# Altium PCB Final PCB.PcbDoc
Units mm, origin at the board's own origin, x right, y up, seen from the top; angles counter-clockwise.
Board outline 152.4 x 101.6 mm, 2 copper layers (Top Layer, Bottom Layer); 40 components, 30 nets, 161 pads, 16 vias.
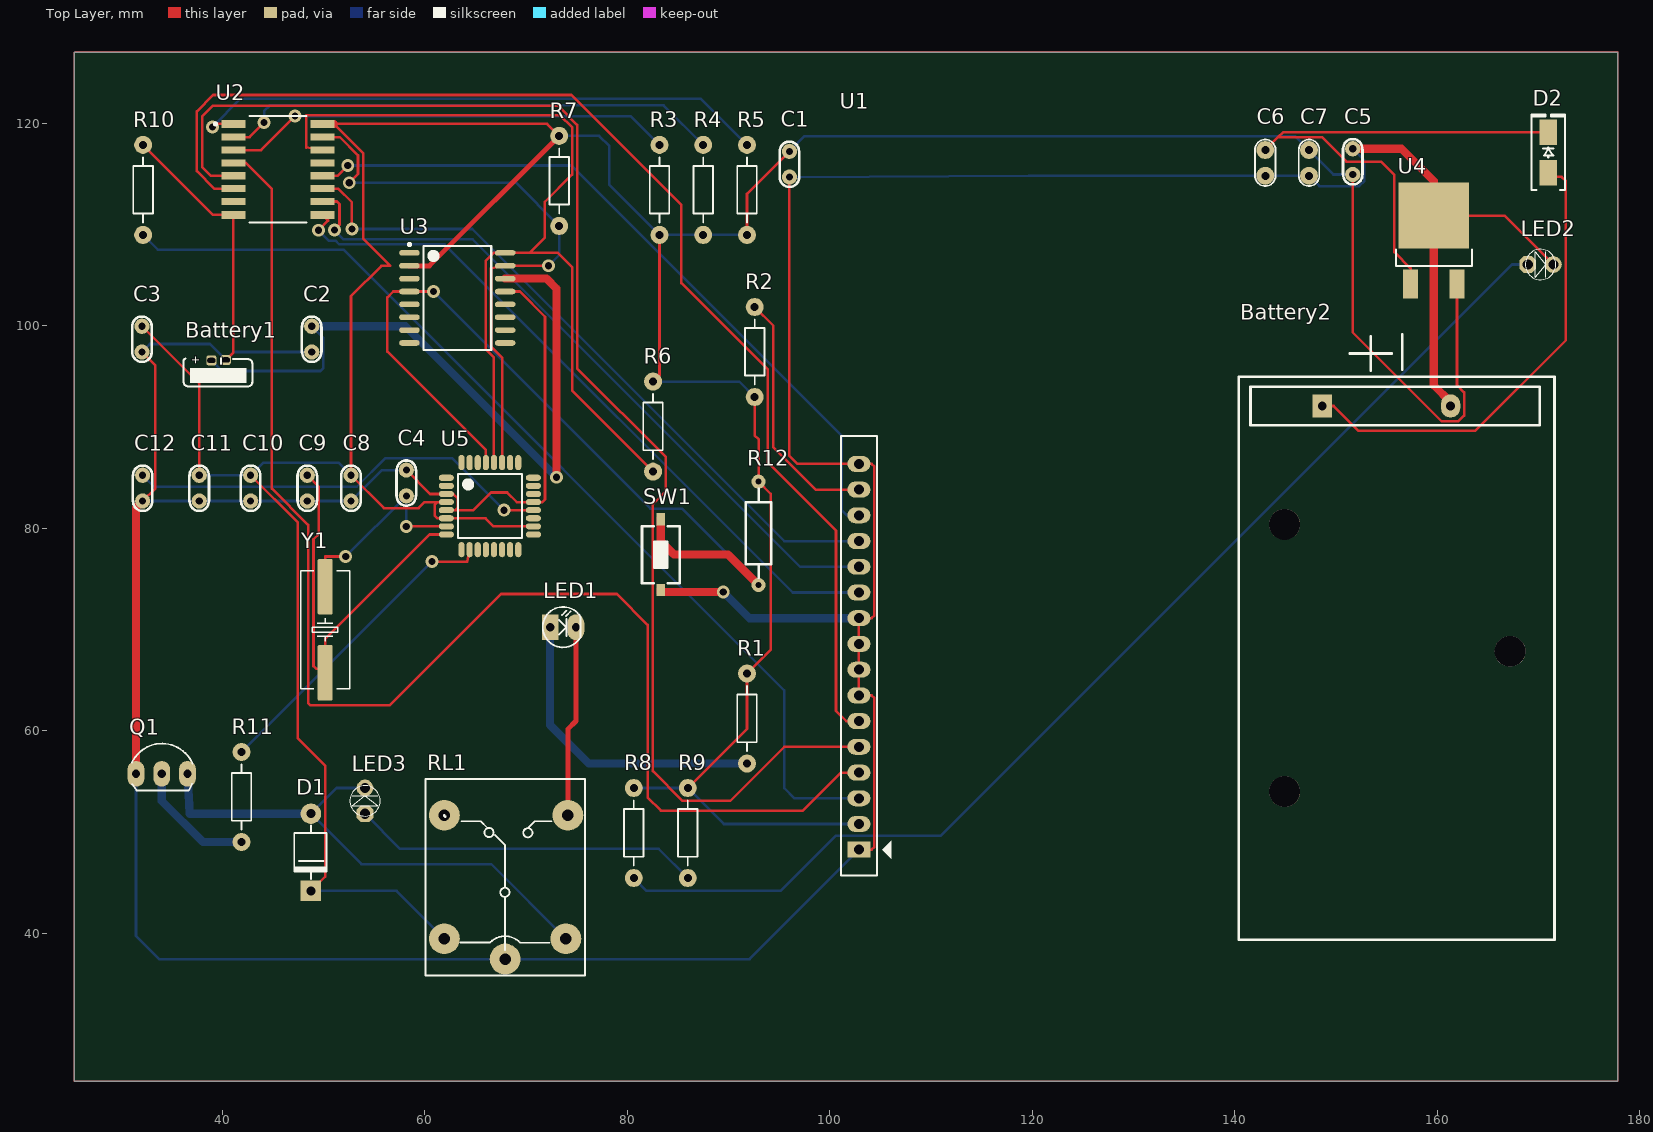
[diagram p0: Top Layer view]
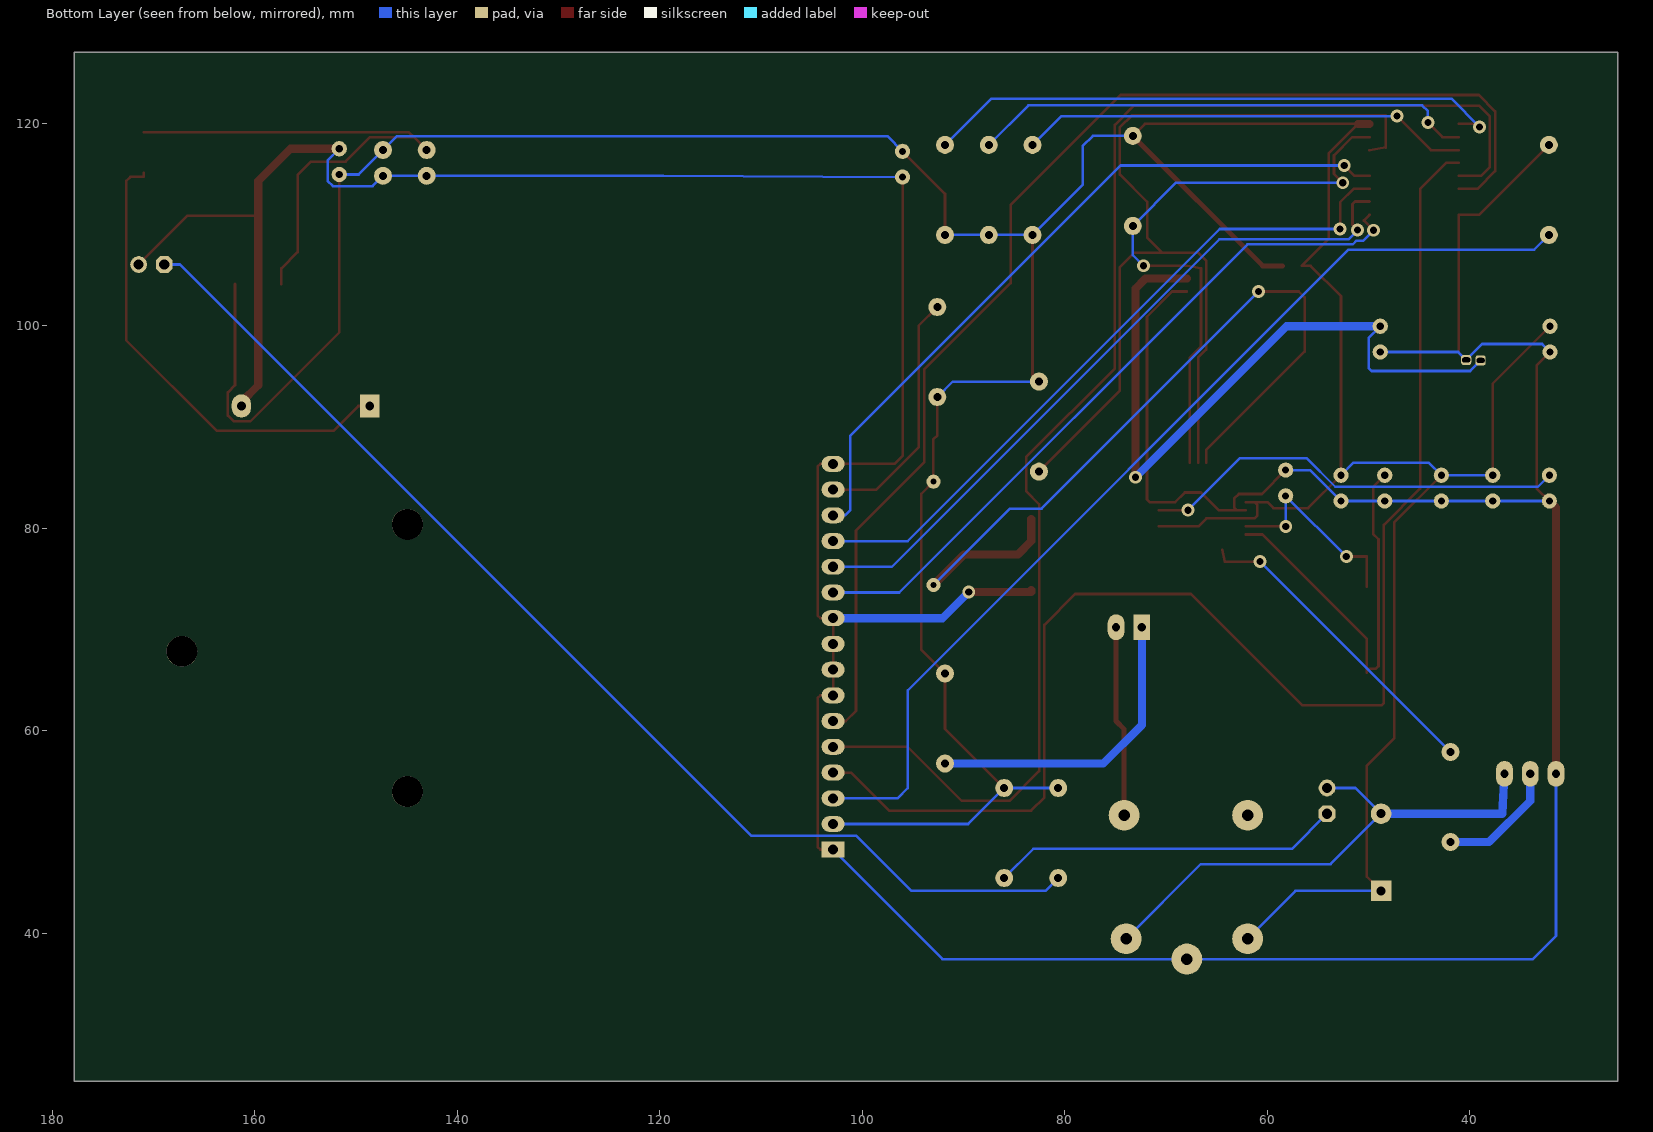
[diagram p1: Bottom Layer view, seen from below]
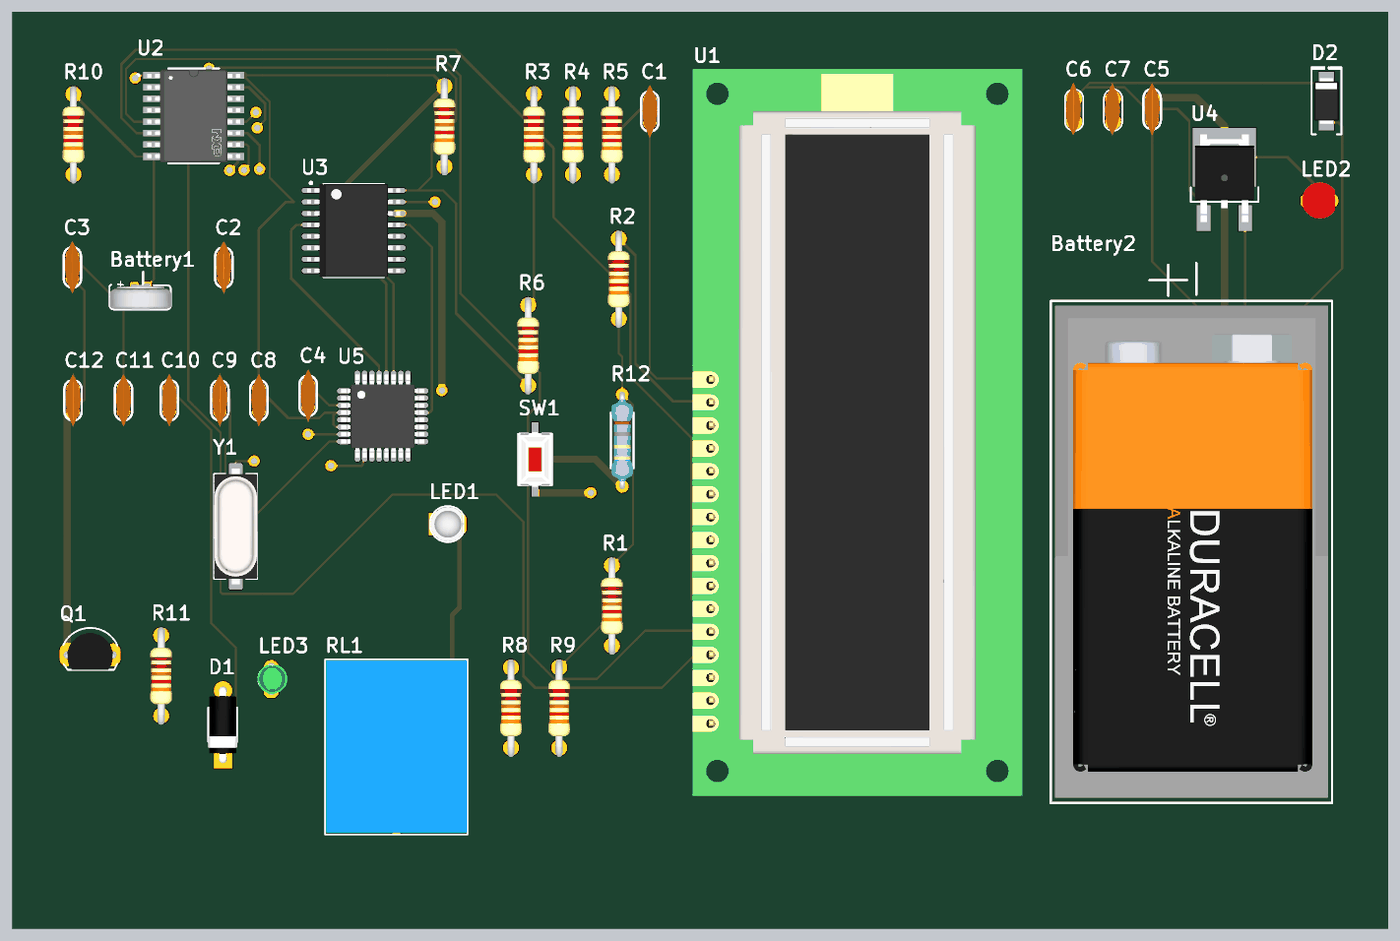
[diagram p2: 3D render of the assembled board from above, using the file's embedded part models]

## Layer stack, top to bottom
Top Solder: solder mask 0.0102, Solder Resist, Dk 3.5
Top Layer: signal copper 0.0356
Dielectric 1: dielectric 0.32, FR-4, Dk 4.8
Bottom Layer: signal copper 0.0356
Bottom Solder: solder mask 0.0102, Solder Resist, Dk 3.5

## Board outline
25.4,25.4 177.8,25.4 177.8,127 25.4,127

## Design rules (kind name [scope] priority, off if disabled: settings)
Clearance [All] p1: gap=0.254 ignorepadtopadclearanceinfootprint=FALSE
PolygonConnect [All] p1: connectstyle=Relief reliefconductorwidth=0.254 reliefentries=4 polygonreliefangle="90 Angle" airgapwidth=0.254
RoutingVias [All] p1: holewidth=0.711 width=1.27 viastyle="Through Hole" minholewidth=0.711 minwidth=1.27 maxholewidth=0.711 maxwidth=1.27
SolderMaskExpansion [All] p1: expansion=0.102 istentingtop=FALSE
SupplyNets "Schematic Supply Nets_1" [InNet('+5')] p1: voltage=0.000
SupplyNets "Schematic Supply Nets" [InNet('GND')] p2: voltage=0.000
Width [All] p1: maxlimit=1.5 minlimit=0.5 preferedwidth=1
30 further rules are at their usual default settings.

## Components (designator, comment, footprint, x,y, rotation, side; value= is the part's Value field where it differs from the comment)
Battery1 "3V" "PIN 3.6V 20mAh 3/V20H" 39.624,95.758 r90 top value="PIN 3V"
Battery2 "9V" "De Pin 9V" 171.641,39.233 r90 top
C1 "104" "tu gom" 96.012,115.951 r90 top
C2 "104" "tu gom" 48.844,98.679 r90 top
C3 "104" "tu gom" 32.08,98.679 r90 top
C4 "22pF" "tu gom" 58.184,84.474 r90 top
C5 "104" "tu gom" 151.638,116.205 r90 top
C6 "0.33uF" CN1 143.002,114.808 r90 top
C7 "22uF" CN1 147.32,114.808 r90 top
C8 "104" "tu gom" 52.723,83.966 r90 top
C9 "22pF" "tu gom" 48.405,83.966 r90 top
C10 "104" "tu gom" 42.817,83.966 r90 top
C11 "104" "tu gom" 37.737,83.966 r90 top
C12 "104" "tu gom" 32.149,83.966 r90 top
D1 "100v" "DIODE 1A" 48.768,53.086 r90 top
D2 "SS34" "DIODE SMA" 170.942,117.094 r90 top
LED1 "LED 3mm" LED-3MM-WHITE 72.39,70.231 r0 top
LED2 "Power LED" LED-3MM-RED 168.91,106.045 r0 top
LED3 "Relay Status LED" LED-3MM-GREEN 54.102,51.816 r90 top
Q1 "?" TO92 34.036,55.753 r0 top value=C9014
R1 "1k" R1/4W 91.821,56.769 r90 top
R2 "220" R1/4W 92.583,92.964 r90 top
R3 "10k" R1/4W 83.185,108.966 r90 top
R4 "10k" R1/4W 87.503,108.966 r90 top
R5 "10k" R1/4W 91.821,108.966 r90 top
R6 "10k" R1/4W 82.55,85.598 r90 top
R7 "10k" R1/4W 73.279,109.855 r90 top
R8 "1k" R1/4W 80.645,45.466 r90 top
R9 "1k" R1/4W 85.979,45.466 r90 top
R10 "1k" R1/4W 32.194,108.966 r90 top
R11 "1k" R1/4W 41.91,49.022 r90 top
R12 "10k" "tro vach 1/4w" 92.964,79.502 r90 top
RL1 "Relay" "Relay 5 Chan SRD" 67.945,37.465 r90 top
SW1 "Nut Nhan" "Nut Nhan 2 Chan SMD 3x6x2.5" 83.312,77.399 r90 top
U1 "LCD1602" "LCD1602 with Jump" 102.87,48.26 r90 top
U2 "PCF8574" FP-SOT162-1-MFG 45.511,115.443 r0 top
U3 "DS3231" "SOIC 16" 63.22,102.743 r0 top
U4 "L7805" DPAK_118_446_112X59_SMD 159.512,108.144 r90 top
U5 "ATMEGA328P" TQFP-32 66.439,82.188 r0 top
Y1 "16Mhz" "Thach Anh 2 chan SMD" 50.165,69.977 r90 top value=4Mhz

## Footprints (in the part's own frame and the unit in brackets; to place one, negate y for a bottom-side part, rotate by r counter-clockwise, add the part's x,y. Pads: shape width x height; smd on the part's side, far side on the other; paste and mask are expansions set on the pad)
CN1 [mil]
  round 70 hole 31: 1(0,0) 2(100,0)
  silkscreen extent -40,-40 141,40, body extent -60,-30 170,37, height 265
"De Pin 9V" [mil]
  round 120 hole 120: 0(581.4,1052.4) 0(1126.9,175.9) 0(1620.4,1052.5)
  rect 90x75 hole 34: 1(2080.5,905.75)
  oval 90x75 hole 34: 2(2080.5,407.05)
  silkscreen extent 5,3 2360,1230, body extent 27,20 2173,1210, height 894
"DIODE 1A" [mil] "Diode 1A"
  round 80 hole 35: 1(-50,0)
  rect 80x80 hole 35: 2(-350,0)
  silkscreen extent -305,-61 -95,65, body extent -366,-61 -34,65, height 122
"DIODE SMA" [mm] "SMA"
  rect 2.5x1.7 smd: 1(-2,0) 2(2,0)
  silkscreen extent -3.68,-1.65 3.75,1.65, body extent -2.6,-1.37 2.6,1.37, height 2.4
DPAK_118_446_112X59_SMD [mm] "CASE: DPAK"
  rect 2.85x1.5 smd: 1(-4.023,2.163) 3(-4.023,-2.417)
  rect 6.5x7 smd: 2(2.727,-0.127)
  silkscreen extent -2.22,-3.9 -0.62,3.6, body extent -4.47,-3.43 5.23,3.15, height 2.3
FP-SOT162-1-MFG [mm]
  rect 2.4x0.8 smd paste+0 mask+0: 1(-4.4,4.495) 8(-4.4,-4.495) 9(4.4,-4.495) 16(4.4,4.495)
  rect 2.4x0.7 smd paste+0 mask+0: 2(-4.4,3.175) 3(-4.4,1.905) 4(-4.4,0.635) 5(-4.4,-0.635) 6(-4.4,-1.905) 7(-4.4,-3.175) 10(4.4,-3.175) 11(4.4,-1.905) 12(4.4,-0.635) 13(4.4,0.635) 14(4.4,1.905) 15(4.4,3.175)
  silkscreen extent -6.29,-5.25 2.82,5.25, body extent -5.72,-5.95 5.72,5.95, height 0.25
"LCD1602 with Jump" [mil] "LCD dipslay 16x2, 16 pin"
  rect 62x90 hole 39: 1(0,0)
  oval 62x90 hole 39: 2(100,0) 3(200,0) 4(300,0) 5(400,0) 6(500,0) 7(600,0) 8(700,0) 9(800,0) 10(900,0) 11(1000,0) 12(1100,0) 13(1200,0) 14(1300,0) 15(1400,0) 16(1500,0)
  silkscreen extent -100,-125 1608,70, body extent -320,-1353 2850,84, height 764
LED-3MM-GREEN [mil]
  oct 65x65 hole 40: 1(0,0)
  round 65 hole 40: 2(100,0)
  silkscreen extent -9,-59 109,59, body extent -15,-70 112,60, height 182
LED-3MM-RED [mil]
  oct 65x65 hole 40: 1(0,0)
  round 65 hole 40: 2(100,0)
  silkscreen extent -9,-59 109,59, body extent -27,-77 117,80, height 181
LED-3MM-WHITE [mil] "LED 2 PIN, 3ly Only colour"
  rect 65x100 hole 32: 1(0,0)
  oval 65x100 hole 32: 2(100,0)
  silkscreen extent -29,-78 118,79, body extent -25,-75 113,75, height 217
"Nut Nhan 2 Chan SMD 3x6x2.5" [mm] "Switch SMD type"
  rect 1.2x0.8 smd: 1(-3.5,0) 2(3.5,0)
  silkscreen extent -2.82,-1.85 2.82,1.85, body extent -3.05,-1.85 3.05,1.85, height 2.5
"PIN 3.6V 20mAh 3/V20H" [mm] "batttery"
  rrect50% 1x1 hole 0.5 slot 0.8 at 90 deg unplated: 1(0.813,0.686) 2(0.864,-0.737)
  silkscreen extent -1.75,-3.35 0.99,3.43, body extent -1.74,-3.4 0.96,3.4, height 8.4
R1/4W [mil] "R 1/4W, 2 Pin, 350mil"
  round 70 hole 31: 1(0,0) 2(350,0)
  silkscreen extent 48,-38 302,38, body extent -40,-47 386,47, height 111
"Relay 5 Chan SRD" [mil] "Relay SPDT, 5 pin, 10A,W 650mil, L 800mil, H 800mil"
  round 120 hole 45: 1(0,0) 2(559.06,236.22) 3(559.06,-243.78) 4(78.74,-236.22) 5(78.74,236.22)
  silkscreen extent -63,-311 700,310, body extent -55,-306 697,304, height 602
"SOIC 16" [mm] "SOIC, 16-Leads, Body 10.30x7.50mm, Pitch 1.27mm, IPC Medium Density"
  oval 2.032x0.55 smd: 1(-4.725,4.445) 2(-4.725,3.175) 3(-4.725,1.905) 4(-4.725,0.635) 5(-4.725,-0.635) 6(-4.725,-1.905) 7(-4.725,-3.175) 8(-4.725,-4.445) 9(4.725,-4.445) 10(4.725,-3.175) 11(4.725,-1.905) 12(4.725,-0.635) 13(4.725,0.635) 14(4.725,1.905) 15(4.725,3.175) 16(4.725,4.445)
  silkscreen extent -4.85,-5.15 3.35,5.39, body extent -5.15,-5.17 5.16,5.16, height 2.48
"Thach Anh 2 chan SMD" [mm] "SMD Crystal HC49/US-SM package"
  round 0.508 on Mech15: 0(0,0)
  rrect25% 5.5x1.5 smd: 1(-4.25,0) 2(4.25,0)
  silkscreen extent -5.84,-2.41 5.84,2.41, body extent -6.4,-2.41 6.4,2.42, height 4.29
TO92 [mil] "TO-92"
  oval 66x100 hole 32: 1(-100,0) 2(0,0) 3(100,0)
  silkscreen extent -117,-65 120,118, body extent -109,-66 109,95, height 245
TQFP-32 [mm] "TQFP, 32-Leads, Body 7.10x7.10mm, Pitch 0.80mm, IPC Medium Density"
  oval 1.5x0.6 smd mask+0.076: 1(-4.3,2.8) 2(-4.3,2) 3(-4.3,1.2) 4(-4.3,0.4) 5(-4.3,-0.4) 6(-4.3,-1.2) 7(-4.3,-2) 8(-4.3,-2.8) 17(4.3,-2.8) 18(4.3,-2) 19(4.3,-1.2) 20(4.3,-0.4) 21(4.3,0.4) 22(4.3,1.2) 23(4.3,2) 24(4.3,2.8)
  oval 0.6x1.5 smd mask+0.076: 9(-2.8,-4.3) 10(-2,-4.3) 11(-1.2,-4.3) 12(-0.4,-4.3) 13(0.4,-4.3) 14(1.2,-4.3) 15(2,-4.3) 16(2.8,-4.3) 25(2.8,4.3) 26(2,4.3) 27(1.2,4.3) 28(0.4,4.3) 29(-0.4,4.3) 30(-1.2,4.3) 31(-2,4.3) 32(-2.8,4.3)
  silkscreen extent -3.15,-3.15 3.15,3.15, body extent -4.62,-4.62 4.63,4.63, height 1.2
"tro vach 1/4w" [mm]
  round 1.4 hole 0.6: 1(-5.1,0) 2(5.1,0)
  silkscreen extent -4.39,-1.25 4.42,1.25, body extent -5.38,-1.2 5.38,1.2, height 2.41
"tu gom" [mm] "Tu gom mini"
  round 1.5 hole 0.7: 1(-1.27,0) 2(1.27,0)
  silkscreen extent -2.25,-0.97 2.22,0.97, body extent -2.92,-0.85 2.92,0.85, height 6.12

## Part data
Battery1: library part "PIN 3V", "Battery 3VDC , NI-MH 3.6V 20mAh 3/V20H"
Battery2: library part "De pin 9V cam", "De Pin 9V", Ma_Hang=MH002680, Ten="Hộp Đế Pin 9V Thường"
C1 C2 C3 C5 C8 C10 C11 C12: library part "Tu gom 104 50V", "Cắm", Chung_Loai=Cắm, Don_Vi=Con, Ma_Hang=MH004761, So_Chan=2, Ten_Linh_Kien="Tụ gốm 104 100nF 50V"
C4 C9: library part "Tu gom 22pF 50V", "Cắm", Chung_Loai=Cắm, Don_Vi=Con, Ma_Hang=MH004771, So_Chan=2, Ten_Linh_Kien="Tụ gốm 22P 50V"
C6 C7: library part "CAP gom"
D1: library part "Diode 1N4007", "Cắm", Chung_Loai=Cắm, Don_Vi=Con, Ma_Hang=MH001063, Ten_Linh_Kien="Diode 1N4007 1A (DIP)"
D2: library part "Diode SS34 ( 1N5822 )", "Dán", Chung_Loai=Dán, Don_Vi=Con, Ma_Hang=MH002104, Ten_Linh_Kien="Diode SS34 3A 40V SMA ( 1N5822 SS34A)"
LED1: library part "LED 3mm Trang", "Cắm", Chung_Loai=Cắm, Don_Vi=Con, Ma_Hang=MH009001, Ten_Linh_Kien="LED 3MM Trắng SS (1000c)"
LED2: library part "LED 3mm Do", "Cắm", Chung_Loai=Cắm, Don_Vi=Con, Ma_Hang=MH003892, Ten_Linh_Kien="Led 3MM Phủ Đỏ (10c)"
LED3: library part "LED 3mm Xanh La", "Cắm", Chung_Loai=Cắm, Don_Vi=Con, Ma_Hang=MH001054, Ten_Linh_Kien="Led 3MM Phủ Xanh (10c)"
Q1: library part "Trans 2N3904", "NPN transistor EBC"
R1 R2 R3 R4 R5 R6 R7 R8 R9 R10 R11: library part Res, "Res"
R12: library part "Tro Vach 1/4W 5% 10k", "Căm", Chung_Loai=Cắm, Don_Vi=Con, Ma_Hang=MH007354, So_Chan=2, Ten_Linh_Kien="Trở Vạch 1/4w 5% 10K"
RL1: library part "Relay 5 Chan SRD", "Relay 5 Chan", Ma_Hang=MH009374, Ten="Relay 5V10A SRD-05VDC-SL-C Chính Hãng"
SW1: library part "Nut Nhan 2 Chan SMD 3x6x2.5", "Nut Nhan 2 Chan SMD 3x6x2.5", Ma_Hang=MH001036, Ten="Nút Nhấn 2 Chân 3x6x2.5MM SMD"
U1: library part "LCD1602 XL", "LCD 1602 Xanh Lá", CHIP=HD44780, Ma_Hang=67HZ, NCC=NSHOP, Ten="Màn hình LCD 1602 Xanh Lá"
U2: library part CMP-10112-000010-1, "IC I/O EXPANDER I2C 8B 16SOIC", Ambient Temperature Range High=+85°C, Ambient Temperature Range Low=-40°C, Frequency=100kHz, Manufacturer="NXP Semiconductors", Manufacturer Part Number=PCF8574T/3,518, Max Junction Temp=+125°C, Max Supply Voltage=6V, Min Supply Voltage=2.5V, Nominal Supply Current=40uA, Package=SOT162-1, Temperature="-40°C to +85°C", Automotive=No, Category=IC, ComponentLink2Description=Datasheet, ComponentLink2URL=https://www.nxp.com/docs/en/data-sheet/PCF8574_PCF8574A.pdf, Device Class L1="Integrated Circuits (ICs)", Device Class L2="Interface ICs", Device Class L3="I/O Expanders", Digikey Description="IC I/O EXPANDER I2C 8B 16SOIC", Footprint Url=https://www.nxp.com/docs/en/package-information/SOT162-1.pdf, Height=2.65mm, Interface=I2C, Ipc Land Pattern Name=SOIC127P1032X265-16, Lead Free=Yes, Mouser Description="PCF8574 Series 2.5 - 6V Remote 8-bit I/O Expander for I2C-bus - SOIC-16", Number Of I/Os=8, Octopart=https://octopart.com/pcf8574t%2F3%2C518-nxp+semiconductors-10470852, RoHS=TRUE, Standoff Height=0.1mm, Temperature Range High=+85°C, Temperature Range Low=-40°C
U3: library part "DS3231 SMD", "SOIC"
U4: library part REG_35V_5V-1.5A-7.5W-DPAK, "Linear Voltage Regulator IC 1 Output 1.5A DPAK", Alternate Part Number-1="CJ7805 3%", Case/Package=DPAK, Manufacturer=Diodes, Manufacturer Part Number=L7805CDT-TR, Supplier Part Number-1=L7805CDT-TR, Supplier-1="SP ROAD"
U5: library part IC_ATMEGA328P, "AVR AVR® ATmega Microcontroller IC 8-Bit 20MHz 32KB (16K x 16) FLASH 32-TQFP (7x7)", Alternate Part Number-1=NA, Case/Package=32-TQFP, Manufacturer="Microchip Technology", Manufacturer Part Number=ATMEGA328P-AUR, Supplier Part Number-1=ATMEGA328P-AUR, Supplier-1=Arrow
Y1: library part "Thach Anh 2 chan SMD", "Crystal For all Crystal 2pin."

## Via types
v1: diameter 1.27, hole 0.711, Top Layer to Bottom Layer, 16 vias

## Nets (pads, with @x,y where several pads share a name; then routed paths per layer and width w, separated by ;. In a path a pad name is that pad's centre, name@x,y a point inside that pad or via, vN(x,y) a via of type N, cw(c..) or ccw(c..) an arc to the next point about the centre after c; other vN are vias at no path point)
+5: C1.2 C3.2 C5.1 C7.2 C8.2 C10.2 C11.2 D1.2 R1.2 R2.1 R3.1 R4.1 R5.1 R6.2 R7.2 R8.2 R9.2 R12.2 RL1.5 U1.2 U2.16 U3.2 U4.3 U5.4 U5.6 U5.18 | length 426.8
  Top Layer w0.254: C3.2 37.737,94.292 C11.2 ; C10.2 47.447,80.606 47.447,59.284 50.165,56.566 50.165,45.593 D1.2 ; U5.4 61.277,82.588 ; U5.18 66.815,80.188 66.015,80.988 U5.6 61.277,80.988 60.985,81.28 60.985,82.296 61.277,82.588 ; R7.2 72.086,119.938 51.029,119.938 53.924,117.043 53.924,108.604 56.61,105.918 55.728,105.918 52.723,102.913 C8.2 55.968,81.991 59.398,81.991 59.995,82.588 61.277,82.588 ; R6.2 83.185,95.123 R3.1 ; R9.2 91.821,60.198 R1.2 94.158,67.996 94.158,83.408 R12.2 92.964,88.798 92.583,89.179 R2.1 ; R5.1 91.821,113.03 C1.2 ; C5.1 151.638,99.339 160.426,90.551 162.052,90.551 162.636,91.135 162.636,93.421 161.929,94.128 U4.3
  Top Layer w0.5: U3.2 60.452,105.918 R7.2
  Top Layer w0.8: U2.16 U2.16@51.029,119.938
  Bottom Layer w0.254: C11.2 C10.2 44.068,86.487 51.472,86.487 C8.2 ; D1.2 57.214,44.196 RL1.5 ; R7.2 77.216,118.745 78.232,117.729 78.232,113.919 R3.1 R4.1 R5.1 ; R8.2 R9.2 89.535,50.8 U1.2 ; R6.2 91.059,94.488 R2.1 ; C1.2 97.511,118.72 145.948,118.72 C7.2 149.733,114.935 C5.1
A: R2.2 U1.15 | length 24.8
  Top Layer w0.254: R2.2 94.437,100 94.437,87.986 98.603,83.82 U1.15
AREF: C12.2 U5.20 | length 42.4
  Top Layer w0.254: v1(67.843,81.788) U5.20
  Bottom Layer w0.254: C12.2 33.286,84.099 53.289,84.099 56.109,86.919 62.713,86.919 v1(67.843,81.788)
GND: Battery1.2 Battery2.2 C1.1 C2.1 C3.1 C4.2 C5.2 C6.1 C7.1 C8.1 C9.1 C10.1 C11.1 C12.1 LED2.2 Q1.1 R10.2 RL1.1 SW1.1 U1.1 U1.7 U1.8 U1.9 U1.10 U1.16 U2.8 U3.13 U4.2 U5.3 U5.5 U5.21 | length 455.1
  Top Layer w0.254: C3.1 33.401,96.088 33.401,83.948 C12.1 ; R10.2 39.102,110.948 U2.8 41.111,97.372 Battery1.2 ; C4.2 60.54,83.388 U5.3 62.814,83.388 63.271,82.931 63.271,82.042 63.017,81.788 ; U5.5 63.017,81.788 ; U3.13 69.393,103.378 71.882,100.889 71.882,82.842 71.628,82.588 U5.21 69.088,82.588 68.144,83.532 66.548,83.532 64.804,81.788 63.017,81.788 ; C1.1 96.012,87.147 96.799,86.36 U1.16 104.14,86.36 104.394,86.106 104.394,71.374 104.14,71.12 U1.10 U1.9 U1.8 U1.7 104.14,63.5 104.394,63.246 104.394,48.514 104.14,48.26 U1.1 ; U4.2 166.624,110.871 LED2.2
  Top Layer w0.8: Q1.1 31.496,82.043 C12.1 ; SW1.1 83.312,73.711 v1(89.484,73.711) ; C5.2 156.464,117.475 159.639,114.3 U4.2 159.639,94.118 161.301,92.456 Battery2.2
  Bottom Layer w0.254: Q1.1@31.496,55.619 31.496,39.751 33.782,37.465 RL1.1 92.075,37.465 U1.1 ; C3.1 32.868,98.196 38.786,98.196 Battery1.2 41.148,97.409 C2.1 ; C12.1 C11.1 C10.1 C9.1 C8.1 55.771,85.744 C4.2 ; C1.1 119.634,114.808 C6.1 C7.1 148.336,113.792 152.273,113.792 152.781,114.3 152.781,116.332 C5.2
  Bottom Layer w0.8: v1(89.484,73.711) 92.075,71.12 U1.10
NetBattery1_1: Battery1.1 C2.2 U3.14 | length 70.6
  Top Layer w0.8: U3.14 72.009,104.648 73,103.657 v1(73,85.039)
  Bottom Layer w0.254: Battery1.1 39.98,95.529 49.708,95.529 49.987,95.809 49.987,98.806 C2.2
  Bottom Layer w0.8: C2.2 58.09,99.949 v1(73,85.039)
NetBattery2_1: Battery2.1 D2.1 | length 46.8
  Top Layer w0.254: Battery2.1 149.758,92.078 152.225,89.611 163.728,89.611 172.669,98.552 172.669,114.3 172.263,114.706 170.942,114.706 D2.1
NetC4_1: C4.1 U5.7 Y1.2 | length 20.5
  Top Layer w0.254: Y1.2 50.165,77.216 v1(52.196,77.216) ; v1(58.184,80.188) U5.7
  Bottom Layer w0.254: v1(52.196,77.216) C4.1 v1(58.184,80.188)
NetC6_2: C6.2 D2.2 U4.1 | length 53.1
  Top Layer w0.254: C6.2 144.272,118.618 ; U4.1 157.349,105.664 155.753,107.26 155.753,114.884 154.432,116.205 151.003,116.205 148.59,118.618 144.272,118.618 ; D2.2 170.942,119.101 144.755,119.101 144.272,118.618
NetC9_2: C9.2 U5.8 Y1.1 | length 40.4
  Top Layer w0.254: C9.2 49.555,84.086 49.555,79.451 49.022,78.918 49.022,66.396 49.276,66.142 Y1.1@50.165,66.142 ; Y1.1 Y1.1@50.165,66.142 ; U5.8 60.49,79.388 50.165,69.063 Y1.1@50.165,66.142
NetD1_1: D1.1 LED3.2 Q1.3 RL1.4 | length 52.6
  Bottom Layer w0.254: LED3.2 51.308,54.356 D1.1 53.746,46.838 66.572,46.838 RL1.4
  Bottom Layer w0.8: Q1.3 36.805,51.816 D1.1
NetLED1_1: LED1.1 R1.1 | length 30.7
  Bottom Layer w0.8: LED1.1 72.39,60.579 76.2,56.769 R1.1
NetLED2_1: LED2.1 R8.1 | length 114.4
  Bottom Layer w0.254: R8.1 81.915,44.196 95.148,44.196 100.584,49.632 110.947,49.632 167.361,106.045 LED2.1
NetLED3_1: LED3.1 R9.1 | length 34.5
  Bottom Layer w0.254: LED3.1 57.582,48.336 83.109,48.336 R9.1
NetQ1_2: Q1.2 R11.1 | length 12.2
  Bottom Layer w0.8: Q1.2 34.036,53.086 38.1,49.022 R11.1
NetR3_2: R3.2 U2.3 | length 44.6
  Top Layer w0.254: U2.3 43.848,117.348 v1(47.201,120.701)
  Bottom Layer w0.254: v1(47.201,120.701) 80.34,120.701 R3.2
NetR4_2: R4.2 U2.2 | length 50
  Top Layer w0.254: U2.2 42.697,118.618 v1(44.145,120.066)
  Bottom Layer w0.254: v1(44.145,120.066) 44.145,121.209 44.704,121.768 83.591,121.768 R4.2
NetR5_2: R5.2 U2.1 | length 58
  Top Layer w0.254: v1(39.04,119.634) 39.344,119.938 U2.1
  Bottom Layer w0.254: v1(39.04,119.634) 41.834,122.428 87.249,122.428 R5.2
NetR10_1: R10.1 U1.3 | length 99.4
  Bottom Layer w0.254: R10.1 33.642,107.518 51.968,107.518 95.504,63.983 95.504,54.356 96.52,53.34 U1.3
NO: LED1.2 RL1.3 | length 18.9
  Top Layer w0.5: RL1.3 74.137,60.167 74.93,60.96 LED1.2
P0: U1.4 U2.4 | length 136.5
  Top Layer w0.254: U2.4 42.342,116.078 44.907,113.513 44.907,83.922 48.489,80.34 48.489,62.738 48.692,62.535 56.566,62.535 67.539,73.508 78.969,73.508 82.017,70.46 82.017,53.416 83.312,52.121 97.333,52.121 101.092,55.88 U1.4
P1: U1.5 U2.5 | length 138.5
  Top Layer w0.254: U2.5 38.887,114.808 38.024,115.672 38.024,120.65 39.116,121.742 73.152,121.742 75.057,119.837 75.057,95.783 83.82,87.02 83.82,83.668 82.525,82.372 82.525,56.014 85.453,53.086 90.17,53.086 95.504,58.42 U1.5
P2: U1.6 U2.6 | length 122.2
  Top Layer w0.254: U2.6 39.218,113.538 37.498,115.258 37.498,121.166 39.116,122.784 74.473,122.784 85.344,111.912 85.344,104.216 93.853,95.707 93.853,86.538 100.609,79.781 100.609,61.976 101.625,60.96 U1.6
P4: U1.11 U2.9 | length 70.3
  Top Layer w0.254: v1(49.505,109.423) 50.47,110.389 U2.9
  Bottom Layer w0.254: v1(49.505,109.423) 50.521,108.407 51.181,108.407 51.562,108.026 61.976,108.026 96.342,73.66 U1.11
P5: U1.12 U2.10 | length 70.1
  Top Layer w0.254: U2.10 51.333,112.268 51.587,112.014 51.587,109.957 v1(51.079,109.449)
  Bottom Layer w0.254: v1(51.079,109.449) 51.994,108.534 64.745,108.534 97.079,76.2 U1.12
P6: U1.13 U2.11 | length 68.9
  Top Layer w0.254: U2.11 51.46,113.538 52.807,112.192 v1(52.807,109.55)
  Bottom Layer w0.254: v1(52.807,109.55) 64.694,109.55 95.504,78.74 U1.13
P7: U1.14 U2.12 | length 72
  Top Layer w0.254: U2.12 51.384,114.808 v1(52.4,115.824)
  Bottom Layer w0.254: v1(52.4,115.824) 74.498,115.824 101.168,89.154 101.168,81.788 101.676,81.28 U1.14
PD6: R11.2 U5.10 | length 31.3
  Top Layer w0.254: v1(60.706,76.708) 64.185,76.708 U5.10
  Bottom Layer w0.254: R11.2 v1(60.706,76.708)
RST: R12.1 SW1.2 U3.4 U5.29 | length 82.8
  Top Layer w0.254: v1(60.858,103.378) U3.4 56.896,103.378 56.312,102.794 56.312,97.434 66.039,87.707 U5.29
  Top Layer w0.8: SW1.2 83.312,78.74 84.633,77.419 89.947,77.419 R12.1
  Bottom Layer w0.254: v1(60.858,103.378) 82.296,81.94 85.426,81.94 R12.1
SCL: R6.1 U2.14 U3.16 U5.28 | length 98.9
  Top Layer w0.254: U2.14 48.311,117.602 48.311,120.777 73.381,120.777 74.549,119.609 74.549,114.935 71.857,112.243 71.857,108.712 70.333,107.188 ; U5.28 66.839,96.843 66.04,97.642 66.04,106.426 66.802,107.188 U3.16 70.333,107.188 ; R6.1 74.549,93.599 74.549,105.791 73.152,107.188 70.333,107.188
SDA: R7.1 U2.15 U3.15 U5.27 | length 59.5
  Top Layer w0.254: U2.15 51.613,118.618 53.416,116.815 53.416,114.986 v1(52.553,114.122) ; U5.27 67.639,96.851 66.548,97.942 66.548,105.664 U3.15 v1(72.238,105.918)
  Bottom Layer w0.254: v1(52.553,114.122) 69.012,114.122 R7.1 73.279,106.959 v1(72.238,105.918)
pads on no net: Battery2.0 RL1.2 U2.7 U2.13 U3.1 U3.3 U3.5 U3.6 U3.7 U3.8 U3.9 U3.10 U3.11 U3.12 U5.1 U5.2 U5.9 U5.11 U5.12 U5.13 U5.14 U5.15 U5.16 U5.17 U5.19 U5.22 U5.23 U5.24 U5.25 U5.26 U5.30 U5.31 U5.32 Y1.0

## Polygon pours and split planes (outlines as drawn)
GND on Top Layer "GND_L01_P000" (solid, remove dead copper, pour order 0): 177.8,25.4 25.4,25.4 25.4,127 25.527,127.127 177.8,127.127

## Text inside footprints (layer, text, board x,y; h text height)
Battery1: Top Overlay "+" at 37.728,96.137 h0.8 r90; Top Overlay "-" at 40.674,95.987 h2 r90